# Altium PCB 封装.pcbdoc
Units mil, origin at the board's own origin, x right, y up, seen from the top; angles counter-clockwise.
Board outline 1440 x 1120 mil, 4 copper layers (Top Layer, Inner1, Inner2, Bottom Layer); 5 components, 40 nets, 60 pads, 0 vias.
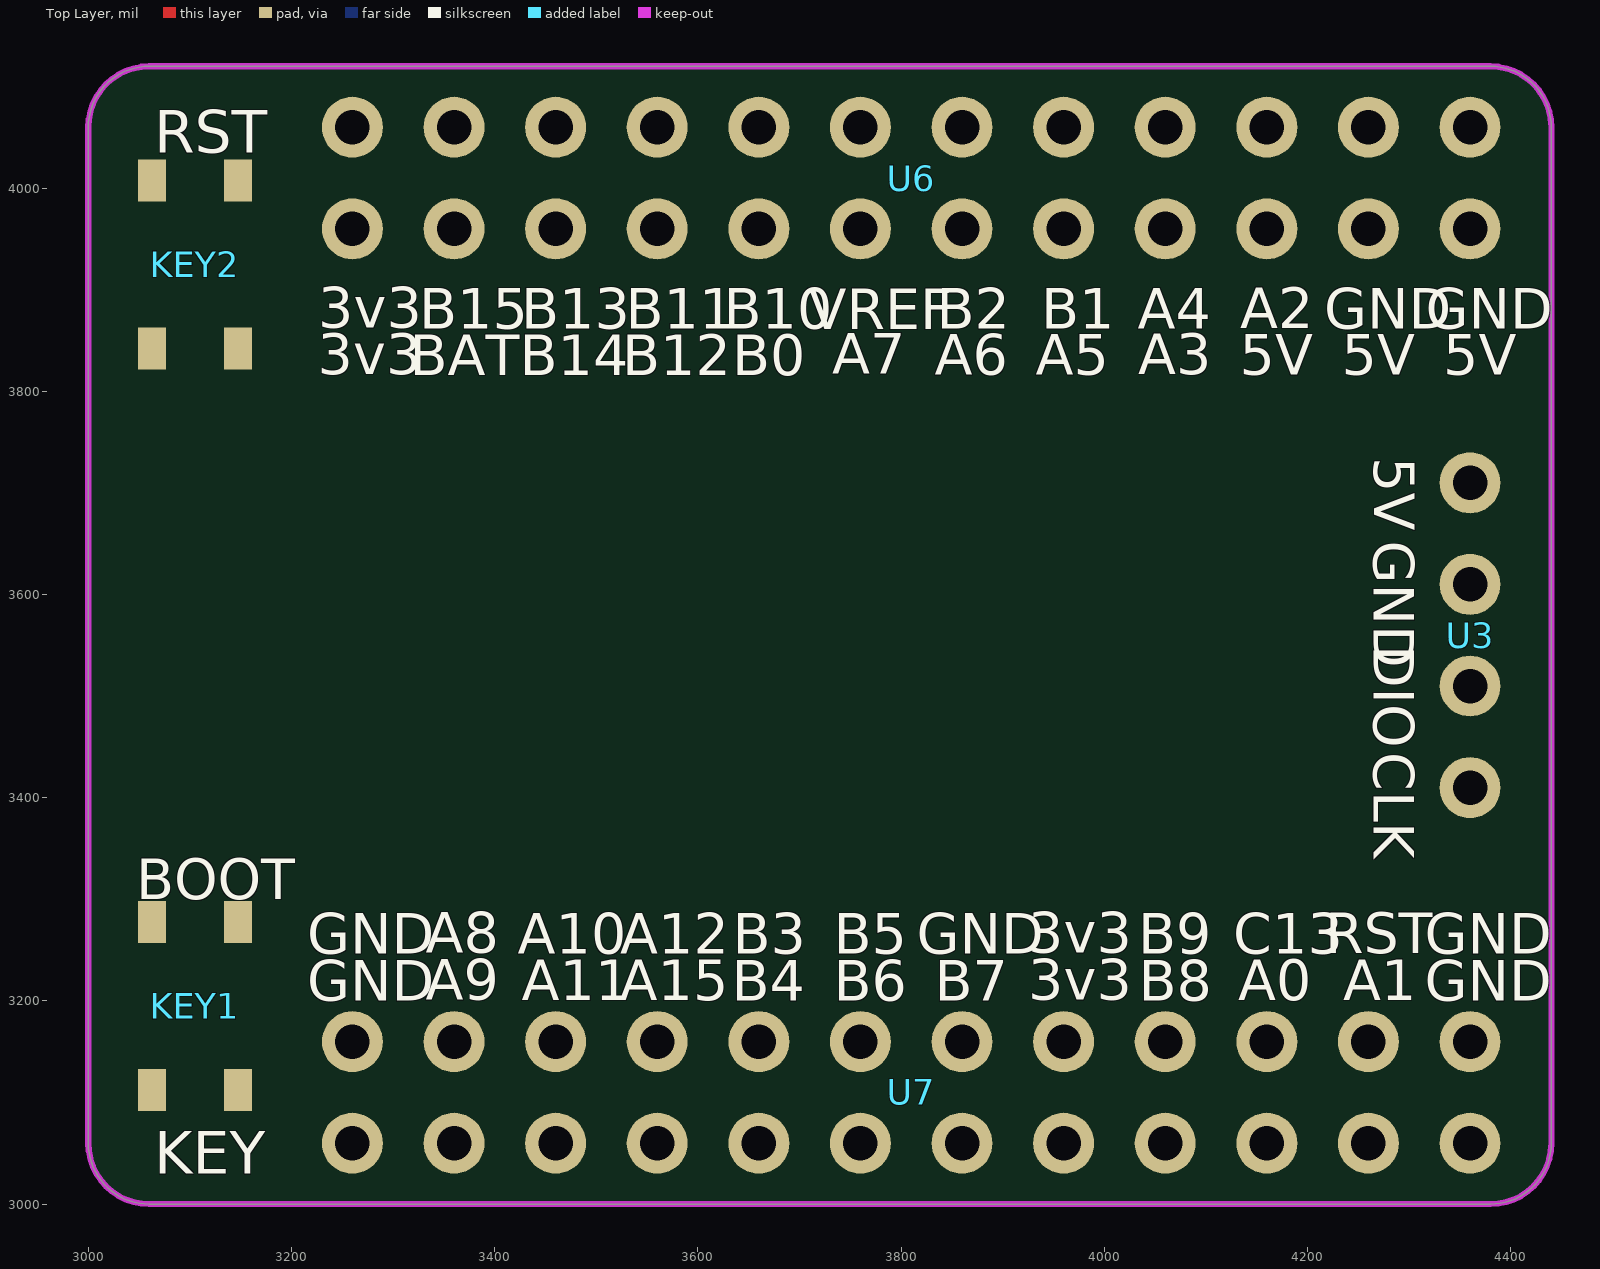
[diagram p0: Top Layer view]
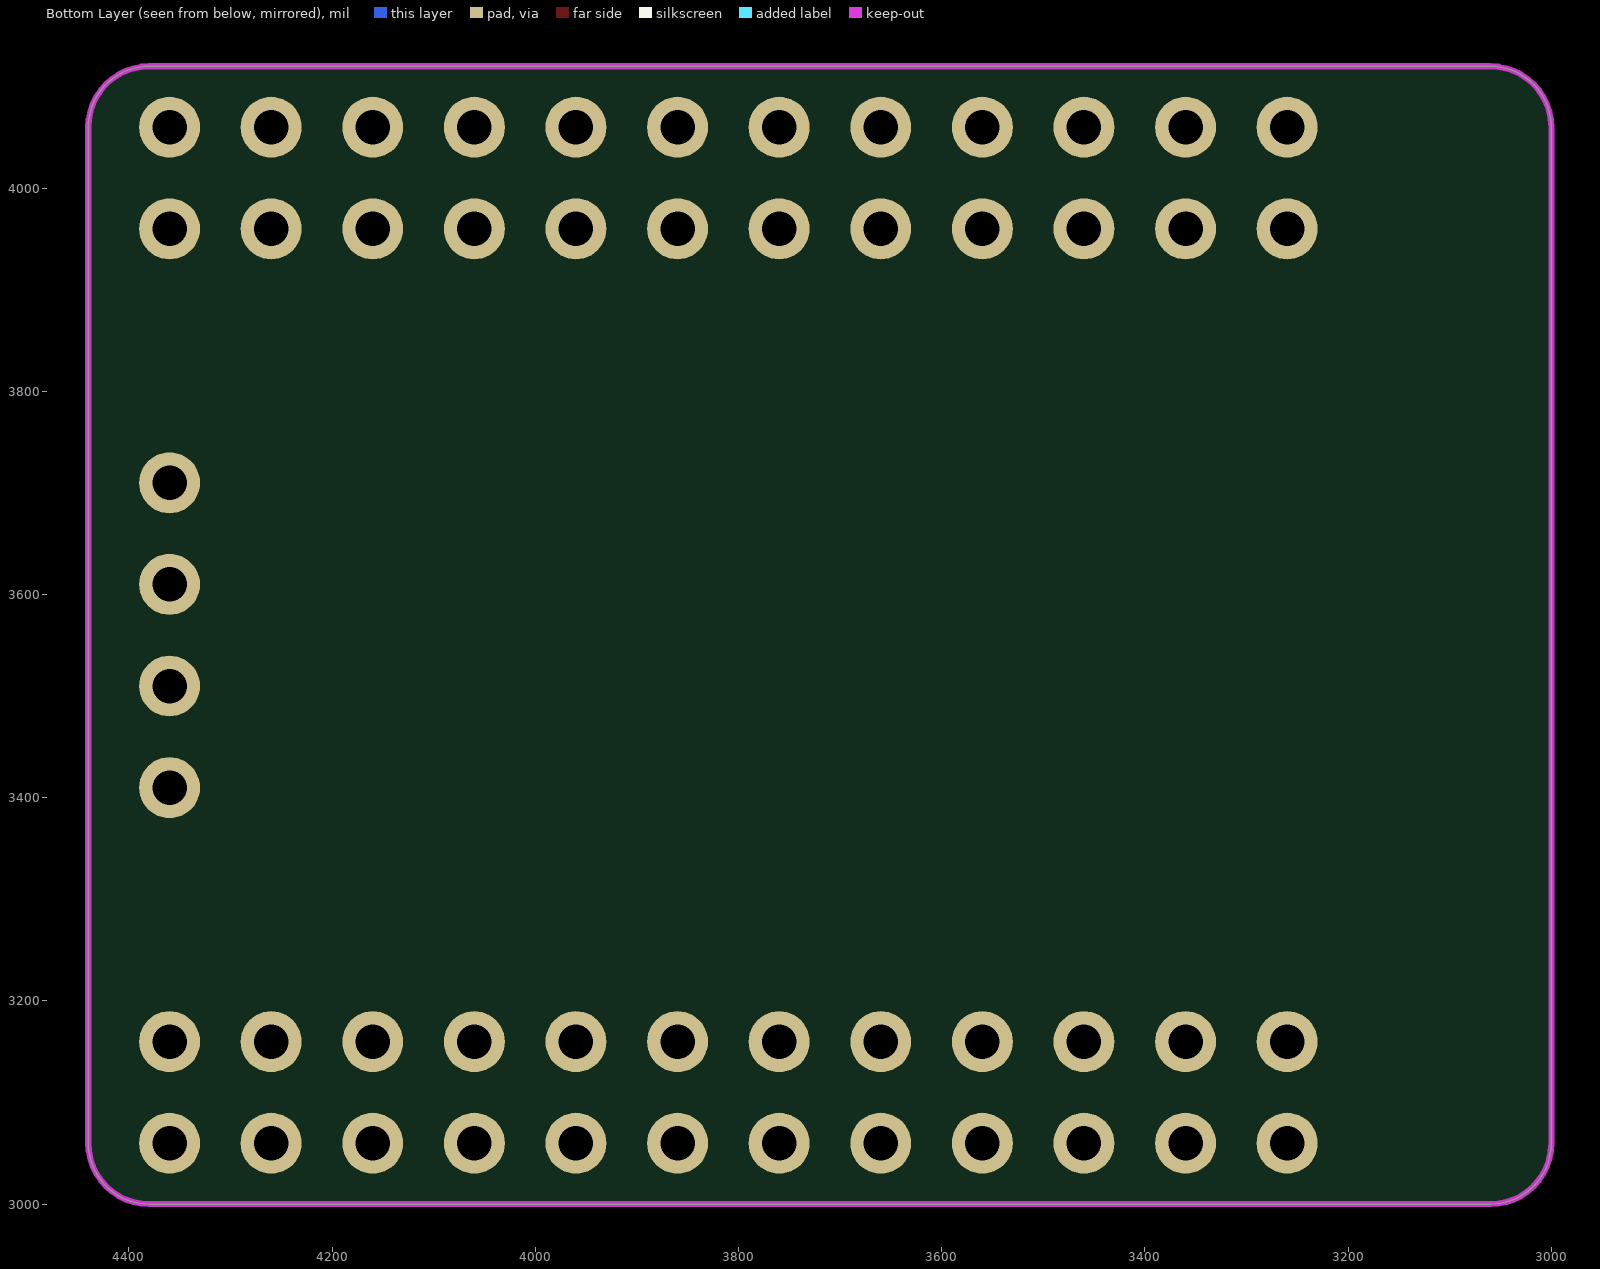
[diagram p1: Bottom Layer view, seen from below]

## Layer stack, top to bottom
Top Layer: signal copper (thickness not stored)
Dielectric: dielectric 12.6, FR-4, Dk 4.8
Inner1: signal copper (thickness not stored)
Dielectric: dielectric 12.6, FR-4, Dk 4.8
Inner2: signal copper (thickness not stored)
Dielectric: dielectric 12.6, FR-4, Dk 4.8
Bottom Layer: signal copper (thickness not stored)

## Board outline
4440,4060 ccw(c4380,4060) 4380,4120 3060,4120 ccw(c3060,4060) 3000,4060 3000,3060 ccw(c3060,3060) 3060,3000 4380,3000 ccw(c4380,3060) 4440,3060

## Components (designator, comment, footprint, x,y, rotation, side; value= is the part's Value field where it differs from the comment)
KEY1 "K2-1808SN-A4SW-01" KEY-SMD_4P-L4.2-W3.2-P2.20-LS4.6 3105,3195 r90 top
KEY2 "K2-1808SN-A4SW-01" KEY-SMD_4P-L4.2-W3.2-P2.20-LS4.6 3105,3925 r270 top
U3 "header 1*4" "header 1*4" 4360,3410 r90 top
U6 "2*12 Header" "header 2*12" 3810,4010 r180 top
U7 "2*12 Header" "header 2*12" 3810,3110 r180 top

## Footprints (in the part's own frame and the unit in brackets; to place one, negate y for a bottom-side part, rotate by r counter-clockwise, add the part's x,y. Pads: shape width x height; smd on the part's side, far side on the other; paste and mask are expansions set on the pad)
"header 1*4" [mil]
  round 60 hole 34: 1(0,0) 2(100,0) 3(200,0) 4(300,0)
"header 2*12" [mil]
  round 60 hole 34: 1(-550,-50) 2(-550,50) 3(-450,-50) 4(-450,50) 5(-350,-50) 6(-350,50) 7(-250,-50) 8(-250,50) 9(-150,-50) 10(-150,50) 11(-50,-50) 12(-50,50) 13(50,-50) 14(50,50) 15(150,-50) 16(150,50) 17(250,-50) 18(250,50) 19(350,-50) 20(350,50) 21(450,-50) 22(450,50) 23(550,-50) 24(550,50)
KEY-SMD_4P-L4.2-W3.2-P2.20-LS4.6 [mm]
  rect 1.05x0.7 smd: 1(2.1,-1.075) 2(2.1,1.075) 3(-2.1,-1.075) 4(-2.1,1.075)

## Nets (pads, with @x,y where several pads share a name; then routed paths per layer and width w, separated by ;. In a path a pad name is that pad's centre, name@x,y a point inside that pad or via, vN(x,y) a via of type N, cw(c..) or ccw(c..) an arc to the next point about the centre after c; other vN are vias at no path point)
3V3: KEY1.2 U6.23 U6.24 U7.9 U7.10
5V: U3.4 U6.2 U6.4 U6.6
BAT: U6.22
BOOT: KEY1.1 U7.8
GND: KEY2.1 U3.3 U6.1 U6.3 U7.1 U7.2 U7.11 U7.23 U7.24
NRST: KEY2.2 U7.3
PA0: U7.6
PA1: U7.4
PA2: U6.5
PA3: U6.8
PA4: U6.7
PA5: U6.10
PA6: U6.12
PA7: U6.14
PA8: U7.21
PA9: U7.22
PA10: U7.19
PA11: U7.20
PA12: U7.17
PA13: U3.2
PA14: U3.1
PA15: U7.18
PB0: U6.16
PB1: U6.9
PB2: U6.11
PB3: U7.15
PB4: U7.16
PB5: U7.13
PB6: U7.14
PB7: U7.12
PB9: U7.7
PB10: U6.15
PB11: U6.17
PB12: U6.18
PB13: U6.19
PB14: U6.20
PB15: U6.21
PC13: U7.5
VREF: U6.13
"": KEY1.3 KEY1.4 KEY2.3 KEY2.4

## Keep-outs
Board Outline Layer:
  the board outline again, w6

## Silkscreen, mask and mechanical layers (free items; w line width, h text height)
Top Silkscreen Layer:
  text "RST" at 3065,4035 h42
  text "3v3" at 3226.35,3862.56 h40
  text "B15" at 3325.58,3861.62 h40
  text "B13" at 3426.31,3861.62 h40
  text "B11" at 3529.03,3861.62 h40
  text "B10" at 3625.34,3861.62 h40
  text "B2" at 3835.11,3861.62 h40
  text "B1" at 3938.06,3861.62 h40
  text "A4" at 4032.78,3861.86 h40
  text "A2" at 4133.64,3862.31 h40
  text "GND" at 4216.61,3861.71 h40
  text "GND" at 4316.61,3861.71 h40
  text "VREF" at 3709.09,3860.98 h40
  text "3v3" at 3225.96,3816.92 h40
  text "A7" at 3732.14,3817.28 h40
  text "A5" at 3932.7,3816.55 h40
  text "A3" at 4033.41,3816.92 h40
  text "5V" at 4133.53,3816.56 h40
  text "5V" at 4233.53,3816.56 h40
  text "5V" at 4333.53,3816.56 h40
  text "BAT" at 3316.58,3815.98 h40
  text "B14" at 3424.88,3815.98 h40
  text "B12" at 3525.73,3815.98 h40
  text "B0" at 3633.97,3815.98 h40
  text "A6" at 3833.17,3816.31 h40
  text "5V" at 4265.49,3735 h40 r270
  text "GND" at 4265,3653 h40 r270
  text "DIO" at 4265.24,3550 h40 r270
  text "CLK" at 4265.48,3445 h40 r270
  text "BOOT" at 3047,3300 h40
  text "A8" at 3332.27,3247.23 h40
  text "A10" at 3422.76,3246.54 h40
  text "A12" at 3523.51,3246.54 h40
  text "3v3" at 3925.24,3247.23 h40
  text "C13" at 4126.71,3246.54 h40
  text "RST" at 4217.38,3246.99 h40
  text "GND" at 3215.5,3246.39 h40
  text "B3" at 3634.17,3246.29 h40
  text "B5" at 3733.5,3246.29 h40
  text "GND" at 3815.5,3246.39 h40
  text "B9" at 4033.45,3246.29 h40
  text "GND" at 4315.5,3246.39 h40
  text "A9" at 3331.97,3200.99 h40
  text "A11" at 3426.45,3200.54 h40
  text "A15" at 3523,3200.54 h40
  text "3v3" at 3925.24,3201.23 h40
  text "A0" at 4131.73,3200.63 h40
  text "A1" at 4235.43,3200.54 h40
  text "GND" at 3215.5,3200.39 h40
  text "B4" at 3633.14,3200.29 h40
  text "B6" at 3733.92,3200.29 h40
  text "B7" at 3832.91,3200.29 h40
  text "B8" at 4033.74,3200.29 h40
  text "GND" at 4315.5,3200.39 h40
  text "KEY" at 3065,3030 h42